# EAGLE board PRC-16105-AFC-1V1 (EAGLE 7.6.0)
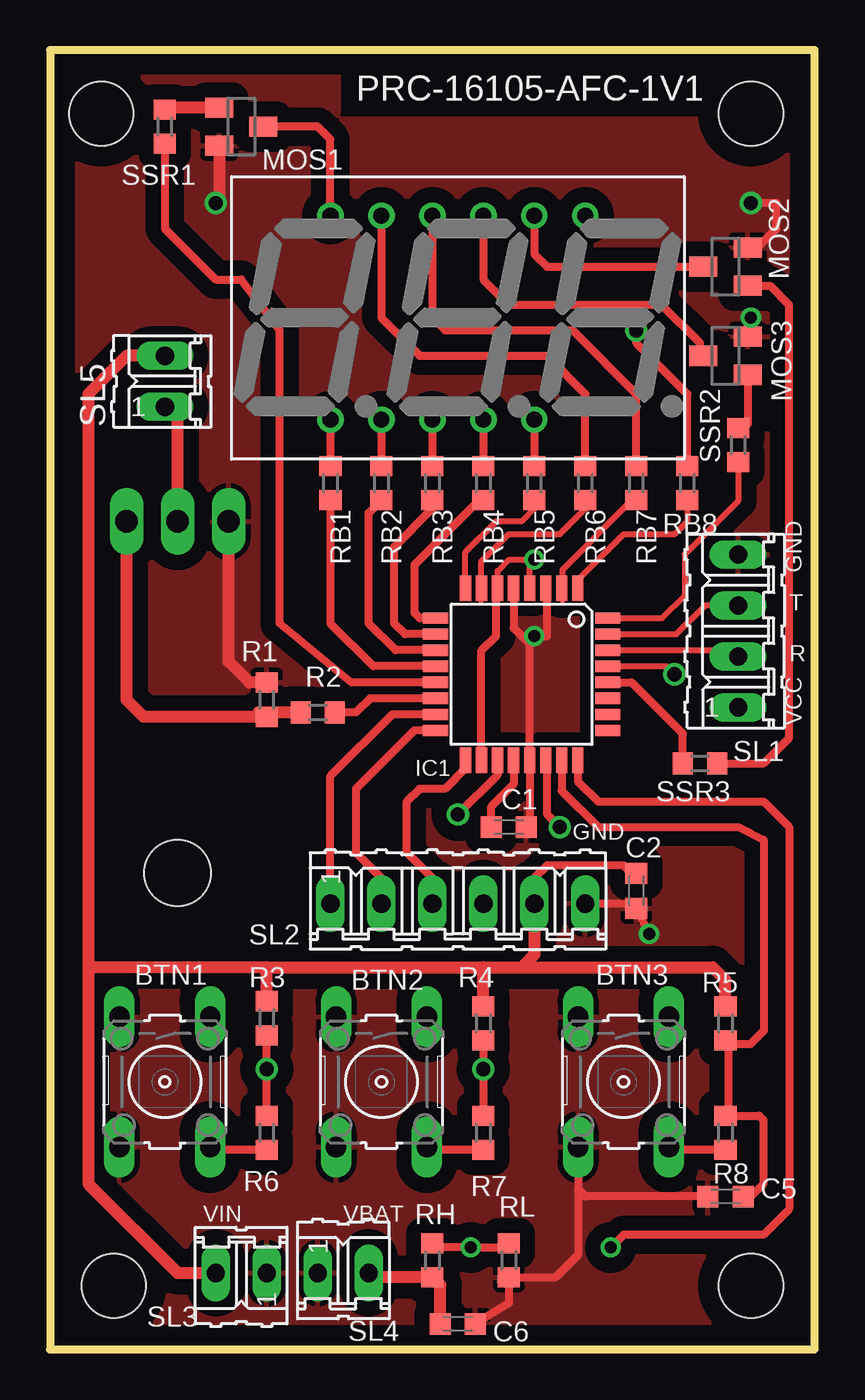
[diagram p0: board, top side]
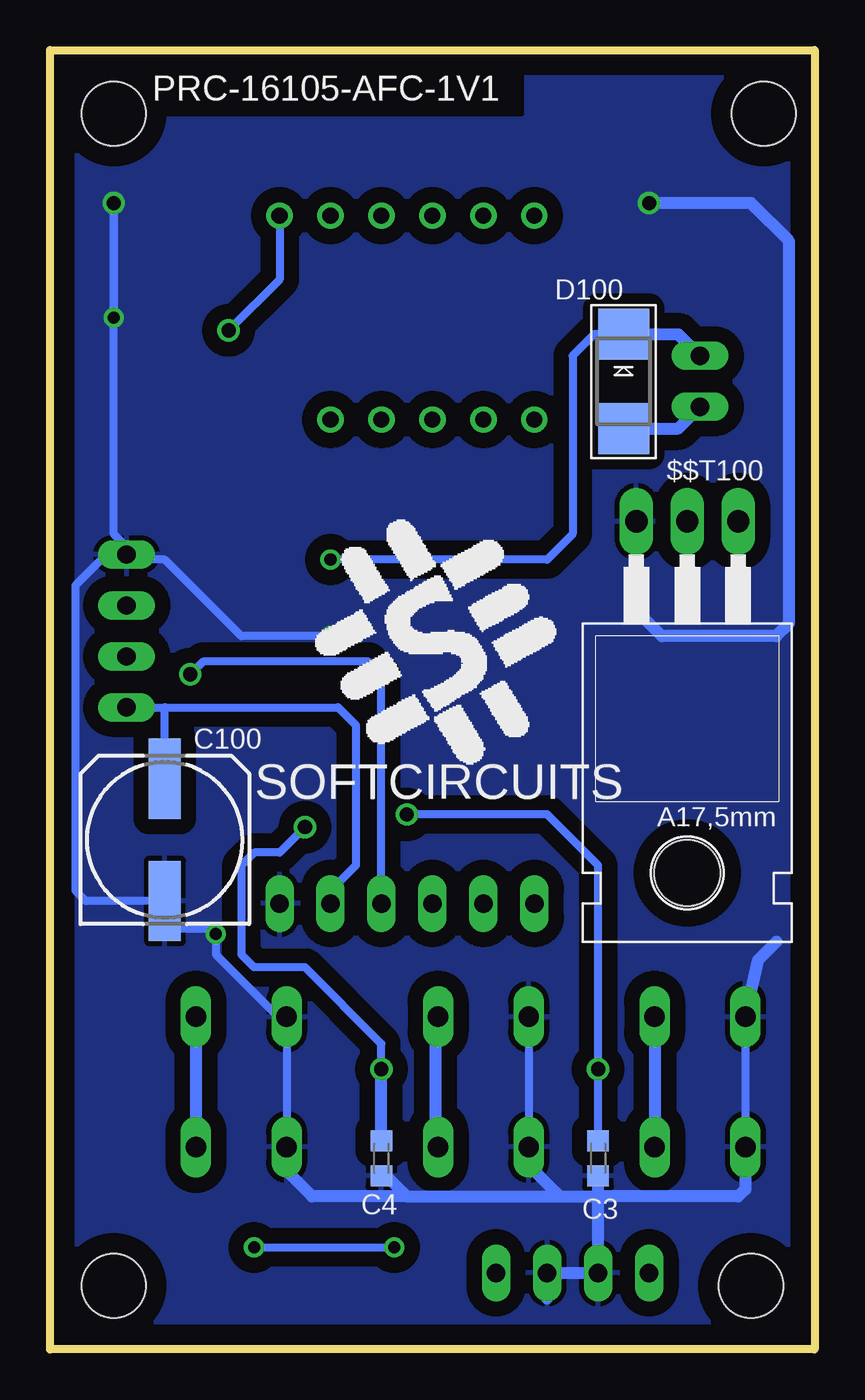
[diagram p1: board, bottom side, seen from below]

Size 38.1 x 64.77 mm. Coordinates in mm from the lower left corner, seen from the top.
Outline: 0,0 38.1,0 38.1,64.77 0,64.77 0,0
Copper layers (1*16): Top 0.035mm / dielectric 1.5mm / Bottom 0.035mm
Design rules "default": minimum track width 10mil, minimum drill 24mil, track to track 8mil, track to pad 8mil, pad to pad 8mil, via to via 8mil, smd to smd 8mil, copper to edge 40mil, drill to drill 8mil, minimum pad ring 10mil, minimum via ring 8mil, stop-mask expansion 4mil, vias tented up to drill 0mil, thermal gap 10mil
Holes 3.2 mm at 3.17,3.17 34.92,3.17 34.92,61.59 2.54,61.59

## Footprints (pad centres in the part's own frame; a part is rotated, then mirrored left to right if it is on the bottom)
TO220 = drill 1.118 long: 1 -2.54,-6.35; 2 0,-6.35; 3 2.54,-6.35 | hole 3.302: 0,11.176
B3F-10XX = drill 1.016 long: 1 -3.251,2.261; 2 3.251,2.261; 3 -3.251,-2.261; 4 3.251,-2.261
C0603K = smd 1.05 x 1.08: 1 -0.875,0; 2 0.875,0
153CLV-0807 = smd 4 x 1.6: + 3.05,0; - -3.05,0
SMADIODE = smd 2.54 x 2.54: A 2.349,0; C -2.349,0
TQFP32-08 = smd 1.27 x 0.559: 1 -4.293,2.8; 2 -4.293,2; 3 -4.293,1.2; 4 -4.293,0.4; 5 -4.293,-0.4; 6 -4.293,-1.2; 7 -4.293,-2; 8 -4.293,-2.8; 17 4.293,-2.8; 18 4.293,-2; 19 4.293,-1.2; 20 4.293,-0.4; 21 4.293,0.4; 22 4.293,1.2; 23 4.293,2; 24 4.293,2.8 | smd 0.559 x 1.27: 9 -2.8,-4.293; 10 -2,-4.293; 11 -1.2,-4.293; 12 -0.4,-4.293; 13 0.4,-4.293; 14 1.2,-4.293; 15 2,-4.293; 16 2.8,-4.293; 25 2.8,4.293; 26 2,4.293; 27 1.2,4.293; 28 0.4,4.293; 29 -0.4,4.293; 30 -1.2,4.293; 31 -2,4.293; 32 -2.8,4.293
SOT23 = smd 1 x 1.4: 1 -0.95,-1.1; 2 0.95,-1.1; 3 0,1.1
R0603 = smd 1 x 1.1: 1 -0.85,0; 2 0.85,0
04P = drill 0.914 long: 1 -3.81,0; 2 -1.27,0; 3 1.27,0; 4 3.81,0
06P = drill 0.914 long: 1 -6.35,0; 2 -3.81,0; 3 -1.27,0; 4 1.27,0; 5 3.81,0; 6 6.35,0
02P = drill 0.914 long: 1 -1.27,0; 2 1.27,0
SP36012CR = drill 0.8: 1 -6.35,-5.08; 2 -3.81,-5.08; 3 -1.27,-5.08; 4 1.27,-5.08; 5 3.81,-5.08; 7 6.35,5.08; 8 3.81,5.08; 9 1.27,5.08; 10 -1.27,5.08; 11 -3.81,5.08; 12 -6.35,5.08

## Placement (x,y rotation side)
$$T100  TIP122  [TO220]  6.35,34.92 180 bottom
BTN1  [B3F-10XX]  5.71,13.34 270 top
BTN2  [B3F-10XX]  16.51,13.34 270 top
BTN3  [B3F-10XX]  28.57,13.34 270 top
C1  1uF  [C0603K]  22.86,26.04 180 top
C2  .1uF  [C0603K]  29.21,22.86 270 top
C3  .1uf  [C0603K]  10.79,9.53 270 bottom
C4  .1uf  [C0603K]  21.59,9.53 270 bottom
C5  .1uf  [C0603K]  33.66,7.62 180 top
C6  .1uF  [C0603K]  20.32,1.27 0 top
C100  100uF  [153CLV-0807]  32.38,25.4 90 bottom
D100  [SMADIODE]  9.53,48.26 270 bottom
IC1  MEGA8-AI  [TQFP32-08]  23.5,33.66 270 top
LOGO100  [SC_LOGO]  18.41,35.56 180 bottom
MOS1  BSS123  [SOT23]  9.53,60.96 270 top
MOS2  BSS123  [SOT23]  33.66,53.98 90 top
MOS3  BSS123  [SOT23]  33.66,49.53 90 top
R1  10K  [R0603]  10.79,32.38 270 top
R2  100E  [R0603]  13.34,31.75 0 top
R3  10K  [R0603]  10.79,16.51 270 top
R4  10K  [R0603]  21.59,16.26 270 top
R5  10K  [R0603]  33.66,16.26 270 top
R6  100E  [R0603]  10.79,10.79 90 top
R7  100E  [R0603]  21.59,10.79 90 top
R8  100E  [R0603]  33.66,10.79 90 top
RB1  1K  [R0603]  13.97,43.18 90 top
RB2  1K  [R0603]  16.51,43.18 90 top
RB3  1K  [R0603]  19.05,43.18 90 top
RB4  1K  [R0603]  21.59,43.18 90 top
RB5  1K  [R0603]  24.13,43.18 90 top
RB6  1K  [R0603]  26.67,43.18 90 top
RB7  1K  [R0603]  29.21,43.18 90 top
RB8  1K  [R0603]  31.75,43.18 90 top
RH  10k  [R0603]  19.05,4.45 270 top
RL  10k  [R0603]  22.86,4.45 90 top
SL1  uC_UART  [04P]  34.29,35.81 90 top
SL2  uC_Prog_Conn  [06P]  20.32,22.23 0 top
SL3  5V_IN  [02P]  9.53,3.81 180 top
SL4  [02P]  14.61,3.81 0 top
SL5  [02P]  5.71,48.26 90 top
SSR1  51E  [R0603]  5.71,60.96 90 top
SSR2  51E  [R0603]  34.29,45.09 90 top
SSR3  51E  [R0603]  32.38,29.21 0 top
U$1  3X_7_SEG_DISPLAY  [SP36012CR]  20.32,51.44 0 top

## Library data of the parts
$$T100 = transistor
BTN1-BTN3 = switch-omron; MPN: B3F-1000; OC_FARNELL: 176432; OC_NEWARK: 36M3542
C1 C3-C5 R1-R8 RB1-RB8 RH RL SSR1-SSR3 = resistor
C2 C6 = rcl
C100 D100 = adafruit
IC1 = atmel; MPN: ATMEGA8-16AU; OC_FARNELL: 9171371; OC_NEWARK: 73M8863
LOGO100 = _SoftCircuits_logo; SIZE: 150DPI
MOS1-MOS3 = transistor-small-signal
SL1-SL5 = con-amp-quick; OC_FARNELL: unknown; OC_NEWARK: unknown
U$1 = 7 segment displays

## Nets
ADCV1: IC1.24 RH.1 RL.2
BAT_IN: C6.1 RH.2 SL4.2
BTN1: C3.1 IC1.19 R3.2 R6.2
BTN2: C4.1 IC1.22 R4.2 R7.2
BTN3: C5.1 IC1.23 R5.2 R8.2
GND: $$T100.3 BTN1.3 BTN1.4 BTN2.3 BTN2.4 BTN3.3 BTN3.4 C1.1 C2.2 C3.2 C4.2 C5.2 C6.2 C100.- IC1.3 IC1.5 IC1.21 MOS1.2 MOS2.2 MOS3.2 R1.1 RL.1 SL1.4 SL2.6 SL3.1 SL4.1
MISO: IC1.16 SL2.2
MOSI: IC1.15 SL2.1
N$1: BTN1.1 BTN1.2 R6.1
N$2: BTN2.1 BTN2.2 R7.1
N$3: BTN3.1 BTN3.2 R8.1
N$5: C1.2 IC1.20
N$34: MOS1.3 U$1.12
N$35: MOS3.3 U$1.9
N$36: MOS2.3 U$1.8
N$41: $$T100.1 R1.2 R2.1
N$46: $$T100.2 D100.A SL5.1
PB0: IC1.12 RB1.1
PB1: IC1.13 SSR1.1
PB6: IC1.7 RB6.1
PB7: IC1.8 RB5.1
PC5: IC1.28 SSR3.1
PD2: IC1.32 SSR2.1
PD3: IC1.1 RB8.1
PD4: IC1.2 RB7.1
PD5: IC1.9 RB4.1
PD6: IC1.10 RB3.1
PD7: IC1.11 RB2.1
PWM: IC1.14 R2.2
RESET: IC1.29 SL2.4
RXD: IC1.30 SL1.2
SCK: IC1.17 SL2.3
SEG_A: RB6.2 U$1.11
SEG_B: RB8.2 U$1.7
SEG_C: RB4.2 U$1.4
SEG_D: RB2.2 U$1.2
SEG_DP: RB3.2 U$1.3
SEG_E: RB1.2 U$1.1
SEG_F: RB7.2 U$1.10
SEG_G: RB5.2 U$1.5
SEG_SEL_1: MOS1.1 SSR1.2
SEG_SEL_2: MOS3.1 SSR2.2
SEG_SEL_3: MOS2.1 SSR3.2
TXD: IC1.31 SL1.3
VCC: C2.1 C100.+ D100.C IC1.4 IC1.6 IC1.18 R3.1 R4.1 R5.1 SL1.1 SL2.5 SL3.2 SL5.2

## Tracks (layer width: path | path; a pad name or v marks a point on that pad's centre or on a via)
ADCV1  (via drill 0.6)
  Top 0.406: IC1.24 26.3,28.32 27.3,27.3 35.56,27.3 36.83,26.04 36.83,6.99 35.56,5.71 28.57,5.71 v27.94,5.08 | RH.1 19.27,5.08 v20.95,5.08 22.64,5.08 RL.2
  Bottom 0.406: v27.94,5.08 v20.95,5.08
BAT_IN
  Top 0.406: 16.09,3.6 SL4.2
  Top 0.61: 16.09,3.6 RH.2 19.45,3.2 C6.1
BTN1  (via drill 0.7)
  Top 0.406: R6.2 v10.79,13.97 R3.2 | IC1.19 22.3,28.64 v20.32,26.67
  Bottom 0.406: v20.32,26.67 13.34,26.67 10.79,24.13 v10.79,13.97 C3.1
BTN2  (via drill 0.7)
  Top 0.406: R7.2 v21.59,13.97 R4.2 | v25.4,26.04 24.77,26.67 24.77,29.29 IC1.22
  Bottom 0.406: v25.4,26.04 26.67,24.77 27.94,24.77 28.57,24.13 28.57,19.68 27.94,19.05 25.4,19.05 21.59,15.24 v21.59,13.97
  Bottom 0.61: C4.1 v21.59,13.97
BTN3
  Top 0.406: IC1.23 25.5,27.84 27.3,26.04 34.29,26.04 35.56,25.4 35.56,15.88 34.92,15.24 33.82,15.24 | C5.1 34.92,7.62 35.56,8.26 35.56,11.43 35.34,11.64 R8.2 33.82,11.81 33.82,15.24 | 33.82,15.24 R5.2
GND  (via drill 0.6, 0.7)
  Top 0.305: 24.77,37.24 IC1.3
  Top 0.406: MOS2.2 35.24,54.92 35.24,54.93 36.2,55.88 36.2,57.15 v34.92,57.15 | 22.46,3.35 RL.1 | C1.1 23.89,26.51 IC1.21 23.89,35.16 23.5,35.56 | RL.1 22.86,2.3 C6.2 | SL2.6 28.97,22.23 C2.2 v29.84,20.71 | MOS3.2 34.76,51.27 v34.92,51.44 | IC1.5 23.09,35.96 23.5,35.56 | 23.5,35.56 v24.13,35.56 24.77,35.56 24.77,37.24 | C5.2 26.67,7.62 26.31,7.98 | BTN3.4 26.31,7.98 | 26.31,7.98 26.31,4.72 25.18,3.6 RL.1
  Top 0.61: $$T100.3 8.89,34.29 9.95,33.23 R1.1 10.58,33.23 10.79,33.02 | MOS1.2 8.43,57.32 v8.26,57.15
  Bottom 0.406: BTN1.3 BTN1.4 | BTN2.3 BTN2.4 | BTN3.4 BTN3.3 26.39,16.51 26.67,16.51 29.84,19.68 v29.84,20.71 30.09,20.95 32.38,20.95 32.38,21.71 33.02,22.35 | v34.92,51.44 v34.92,57.15 34.92,40.64 34.29,40.01 SL1.4 34.04,39.37 32.38,39.37 28.57,35.56 v24.13,35.56 | C3.2 10.79,8.26 | 33.02,22.35 C100.- 32.38,22.23 | 33.02,22.35 36.32,22.35 36.83,22.86 36.83,38.1 35.56,39.37 34.54,39.37
  Bottom 0.61: 13.34,2.54 SL4.1 SL3.1 10.79,7.62 | BTN1.3 2.82,19.41 1.91,20.32 | $$T100.3 8.89,36.83 7.62,35.56 1.91,35.56 1.27,36.2 1.27,55.24 3.17,57.15 v8.26,57.15 | 34.54,39.37 SL1.4 | 10.79,7.62 C3.2 | BTN2.4 14.25,9.17 12.7,7.62 | 12.7,7.62 10.79,7.62 | BTN1.4 3.45,7.98 3.81,7.62 10.79,7.62 | C4.2 21.35,8.65 20.32,7.62 | 20.32,7.62 12.7,7.62 | 20.32,7.62 25.04,7.62 26.31,8.89 BTN3.4
  pour Top (isolate 0.762): 0,64.77 38.1,64.77 38.1,0 0,0
  pour Bottom (isolate 0.762): 0,64.77 38.1,64.77 38.1,0 0,0
MISO
  Top 0.406: IC1.16 18.16,30.86 15.24,27.94 15.24,24.77 16.51,23.5 SL2.2
MOSI
  Top 0.406: IC1.15 17.05,31.66 13.97,28.57 SL2.1
N$1
  Top 0.406: R6.1 8.11,9.95 BTN1.2
  Bottom 0.61: BTN1.1 BTN1.2
N$2
  Top 0.406: R7.1 18.91,9.95 BTN2.2
  Bottom 0.406: 18.91,16.73 18.91,16.51 18.83,16.59 BTN2.1 | 18.91,10.22 BTN2.2
  Bottom 0.61: 18.91,16.51 18.91,10.22
N$3
  Top 0.406: R8.1 30.97,9.95 BTN3.2
  Bottom 0.61: BTN3.1 BTN3.2
N$4
  cutout Bottom: 14.61,64.14 33.66,64.14 33.66,61.59 14.61,61.59
N$5
  Top 0.406: C1.2 21.98,27.07 23.09,28.18 IC1.20
N$6
  cutout Top: 33.66,64.14 14.61,64.14 14.61,61.59 33.66,61.59
N$34
  Top 0.406: U$1.12 13.97,60.33 13.34,60.96 MOS1.3
N$35
  Top 0.406: U$1.9 21.59,53.34 22.86,52.07 30.48,52.07 32.38,50.16 32.38,49.53 MOS3.3
N$36
  Top 0.406: U$1.8 24.13,54.61 24.77,53.98 MOS2.3
N$41
  Top 0.61: $$T100.1 3.81,32.38 4.66,31.54 R1.2 10.38,31.75 R2.1
N$46
  Top 0.61: $$T100.2 6.35,46.35 SL5.1
  Bottom 0.61: D100.A 6.79,45.91 SL5.1
PB0
  Top 0.406: RB1.1 13.97,36.2 16.11,34.05 IC1.12
PB1
  Top 0.406: IC1.13 15.01,33.26 11.43,36.2 11.43,50.8 9.53,53.34 8.26,53.34 5.71,55.88 SSR1.1
PB6
  Top 0.305: IC1.7 21.46,37.34 21.46,39.24 22.86,40.64 25.4,40.64 26.67,41.91 RB6.1
PB7
  Top 0.305: IC1.8 20.7,39.74 22.23,41.27 23.5,41.27 24.13,41.91 RB5.1
  Top 0.406: 23.99,42.19 RB5.1
PC5
  Top 0.406: IC1.28 28.98,33.26 31.54,30.7 SSR3.1
PD2
  Top 0.305: SSR2.1 34.29,42.29 31.62,39.62 31.62,37.59 30.49,36.45 IC1.32
PD3
  Top 0.305: RB8.1 31.75,41.27 31.11,40.64 28.57,40.64 26.3,38.36 IC1.1
PD4
  Top 0.305: IC1.2 25.53,37.34 25.53,38.86 29,42.33 RB7.1
PD5
  Top 0.406: IC1.9 18.41,36.45 18.16,36.7 18.16,39.12 21.38,42.33 RB4.1
PD6
  Top 0.305: RB3.1 19.05,41.91
  Top 0.406: IC1.10 17.68,35.66 17.14,36.2 17.14,40.01 19.05,41.91
PD7
  Top 0.406: 16.73,42.33 RB2.1 15.88,41.7 15.88,36.2 17.21,34.85 IC1.11
PWM
  Top 0.406: IC1.14 15.95,32.45 15.24,31.75 R2.2
RESET  (via drill 0.7)
  Top 0.305: IC1.29 30.71,34.05 v31.11,33.66
  Bottom 0.305: SL2.4 21.59,23.5
  Bottom 0.406: 21.59,23.5 21.59,33.66 22.23,34.29 30.48,34.29 v31.11,33.66
RXD
  Top 0.305: IC1.30 33.97,34.85 SL1.2
SCK
  Top 0.406: IC1.17 20.7,28.95 19.68,27.94 18.41,27.94 17.78,27.3 17.78,24.77 19.05,23.5 SL2.3
SEG_A
  Top 0.406: U$1.11 16.51,51.44 18.41,49.53 24.77,49.53 26.67,47.62 RB6.2
SEG_B  (via drill 0.7)
  Top 0.406: RB8.2 31.75,47.62 29.21,50.16 v29.21,50.8
  Bottom 0.406: U$1.7 26.67,53.34 v29.21,50.8
SEG_C
  Top 0.406: U$1.4 RB4.2
SEG_D
  Top 0.406: U$1.2 RB2.2
SEG_DP
  Top 0.406: U$1.3 RB3.2
SEG_E
  Top 0.406: U$1.1 RB1.2
SEG_F
  Top 0.406: U$1.10 19.05,51.44 19.68,50.8 26.04,50.8 29.21,47.62 RB7.2
SEG_G
  Top 0.406: U$1.5 RB5.2
SEG_SEL_1
  Top 0.61: MOS1.1 5.82,61.91 SSR1.2
SEG_SEL_2
  Top 0.406: MOS3.1 34.76,46.1 SSR2.2
SEG_SEL_3
  Top 0.406: SSR3.2 35.56,29.21 36.83,30.48 36.83,52.07 35.88,53.02 MOS2.1
TXD
  Top 0.305: IC1.31 31.21,35.66 32.64,37.08 SL1.3
VCC  (via drill 0.6)
  Top 0.305: IC1.4 23.89,38.97 v24.13,39.37 22.86,39.37 22.3,38.8 IC1.6
  Top 0.406: IC1.18 21.5,34.83 22.23,35.56 22.23,37.24 IC1.6 | C2.1 28.97,23.73 28.57,24.13 24.77,24.13 24.13,23.5 SL2.5
  Top 0.61: R3.1 10.79,19.05 | 10.79,19.05 21.59,19.05 | 21.59,19.05 23.5,19.05 | SL2.5 24.13,19.68 23.5,19.05 | 10.79,19.05 1.91,19.05 | 1.91,19.05 1.91,8.26 6.35,3.81 SL3.2 | R4.1 21.59,19.05 | 23.5,19.05 33.02,19.05 33.66,18.41 R5.1 | SL5.2 3.81,49.53 1.91,47.62 1.91,19.05
  Bottom 0.406: D100.C 10.99,50.61 12.06,49.53 12.06,40.64 13.34,39.37 v24.13,39.37 | SL1.1 32.38,32 | 32.38,32 23.75,32 22.86,31.11 22.86,24.13 24.13,22.86 SL2.5 | C100.+ 32.38,32
  Bottom 0.61: D100.C 6.79,50.61 SL5.2

## Text on the board
tPlace: PRC-16105-AFC-1V1 | GND | T | R | VCC | GND | VIN | VBAT
bPlace: PRC-16105-AFC-1V1 | SOFTCIRCUITS